# Altium PCB LCD_Dev_PCB.PcbDoc (part 2 of 2)
Units mil, origin at the board's own origin, x right, y up, seen from the top; angles counter-clockwise.
Board outline 2300 x 2120 mil, 4 copper layers (Top Layer, GND, 3.3V, Bottom Layer), stack 35.634 mil thick; 60 components, 58 nets, 366 pads, 68 vias.
Unrouted connection lines stored in the file: 11.
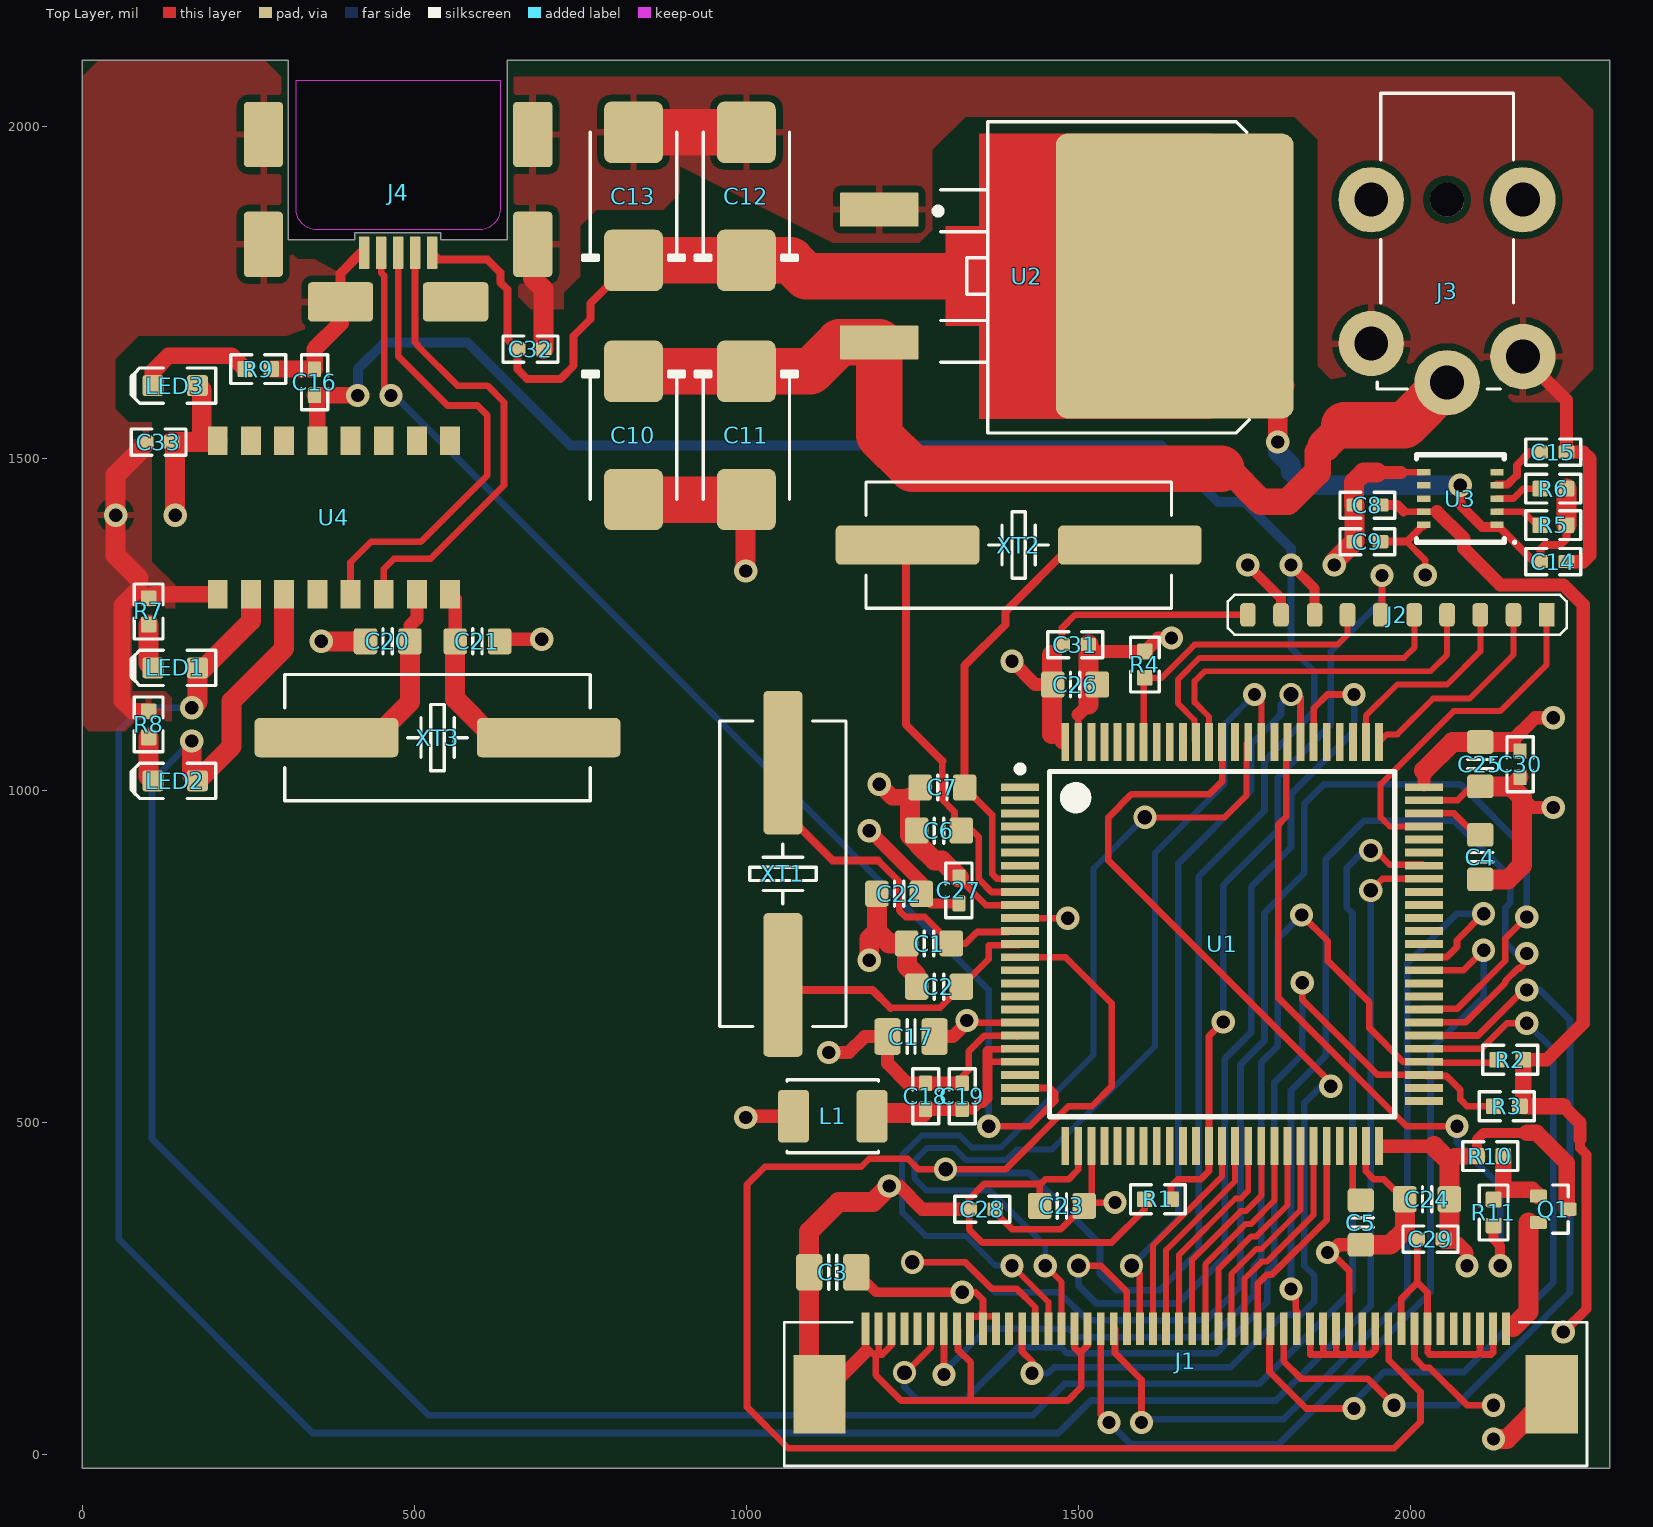
[diagram p0: Top Layer view]

## Other copper (continued)
Top Layer: (continued)
  region net 5V: 1350,1990 1350,1850 1450,1850 1450,1990
  region net 5V: 1450,1990 1450,1560 1700,1560 1700,1990
3.3V (plane layer: these items are gaps in the copper):
  lines w10: 1060,180 1060,-15 2275,-15 2275,190 2275,250 2260,265 2245,265 2195,265 2165,235 2065,235 2040,260 1380,260 1350,290 1305,290 1275,260 1095,260 1060,225 1060,182.01